# Altium PCB maximator-shield.PcbDoc
Units mil, origin at the board's own origin, x right, y up, seen from the top; angles counter-clockwise.
Board outline 2475 x 2175 mil, 2 copper layers (Top Layer, Bottom Layer); 56 components, 43 nets, 187 pads, 78 vias.
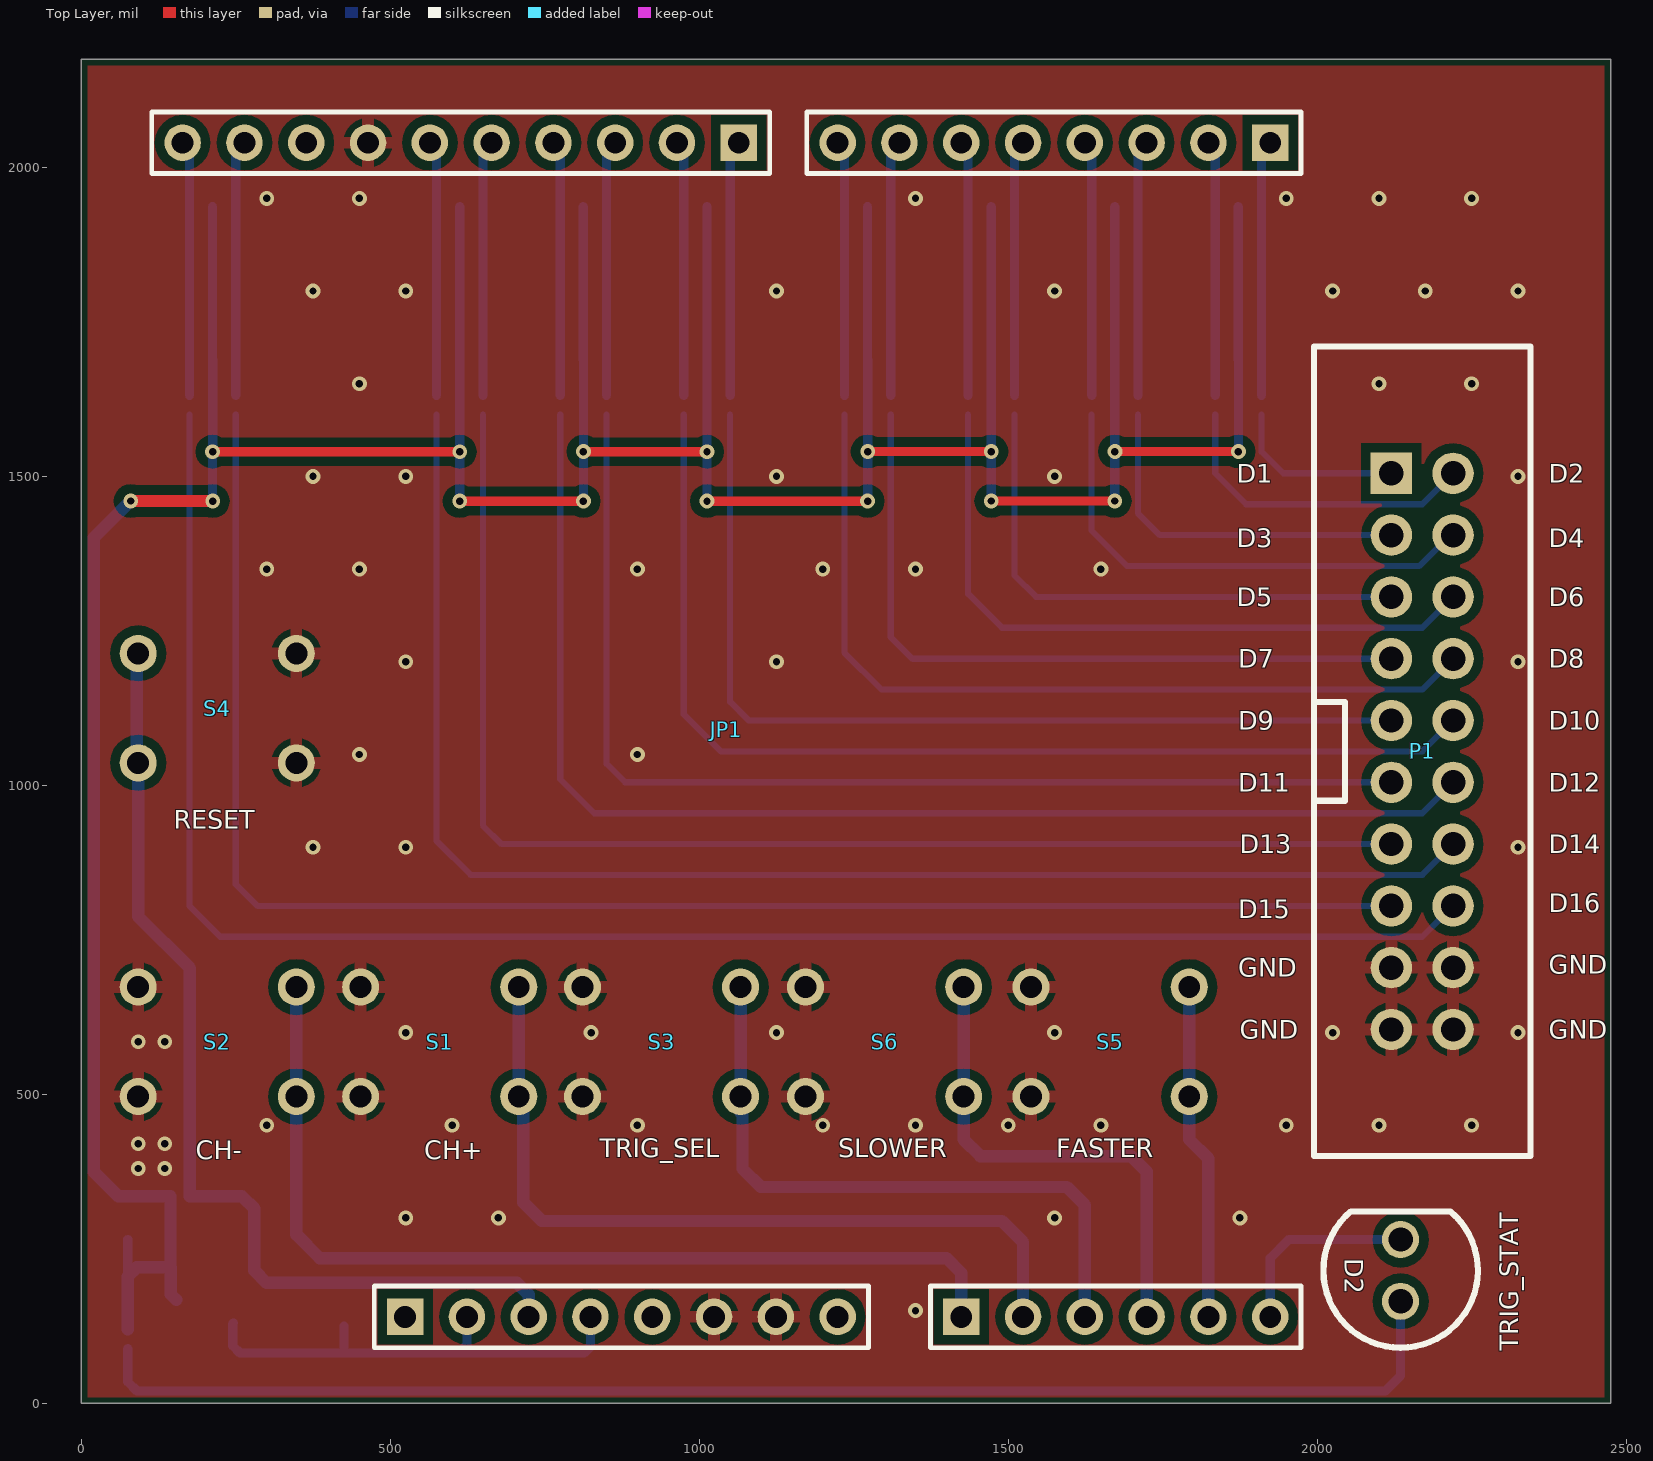
[diagram p0: Top Layer view]
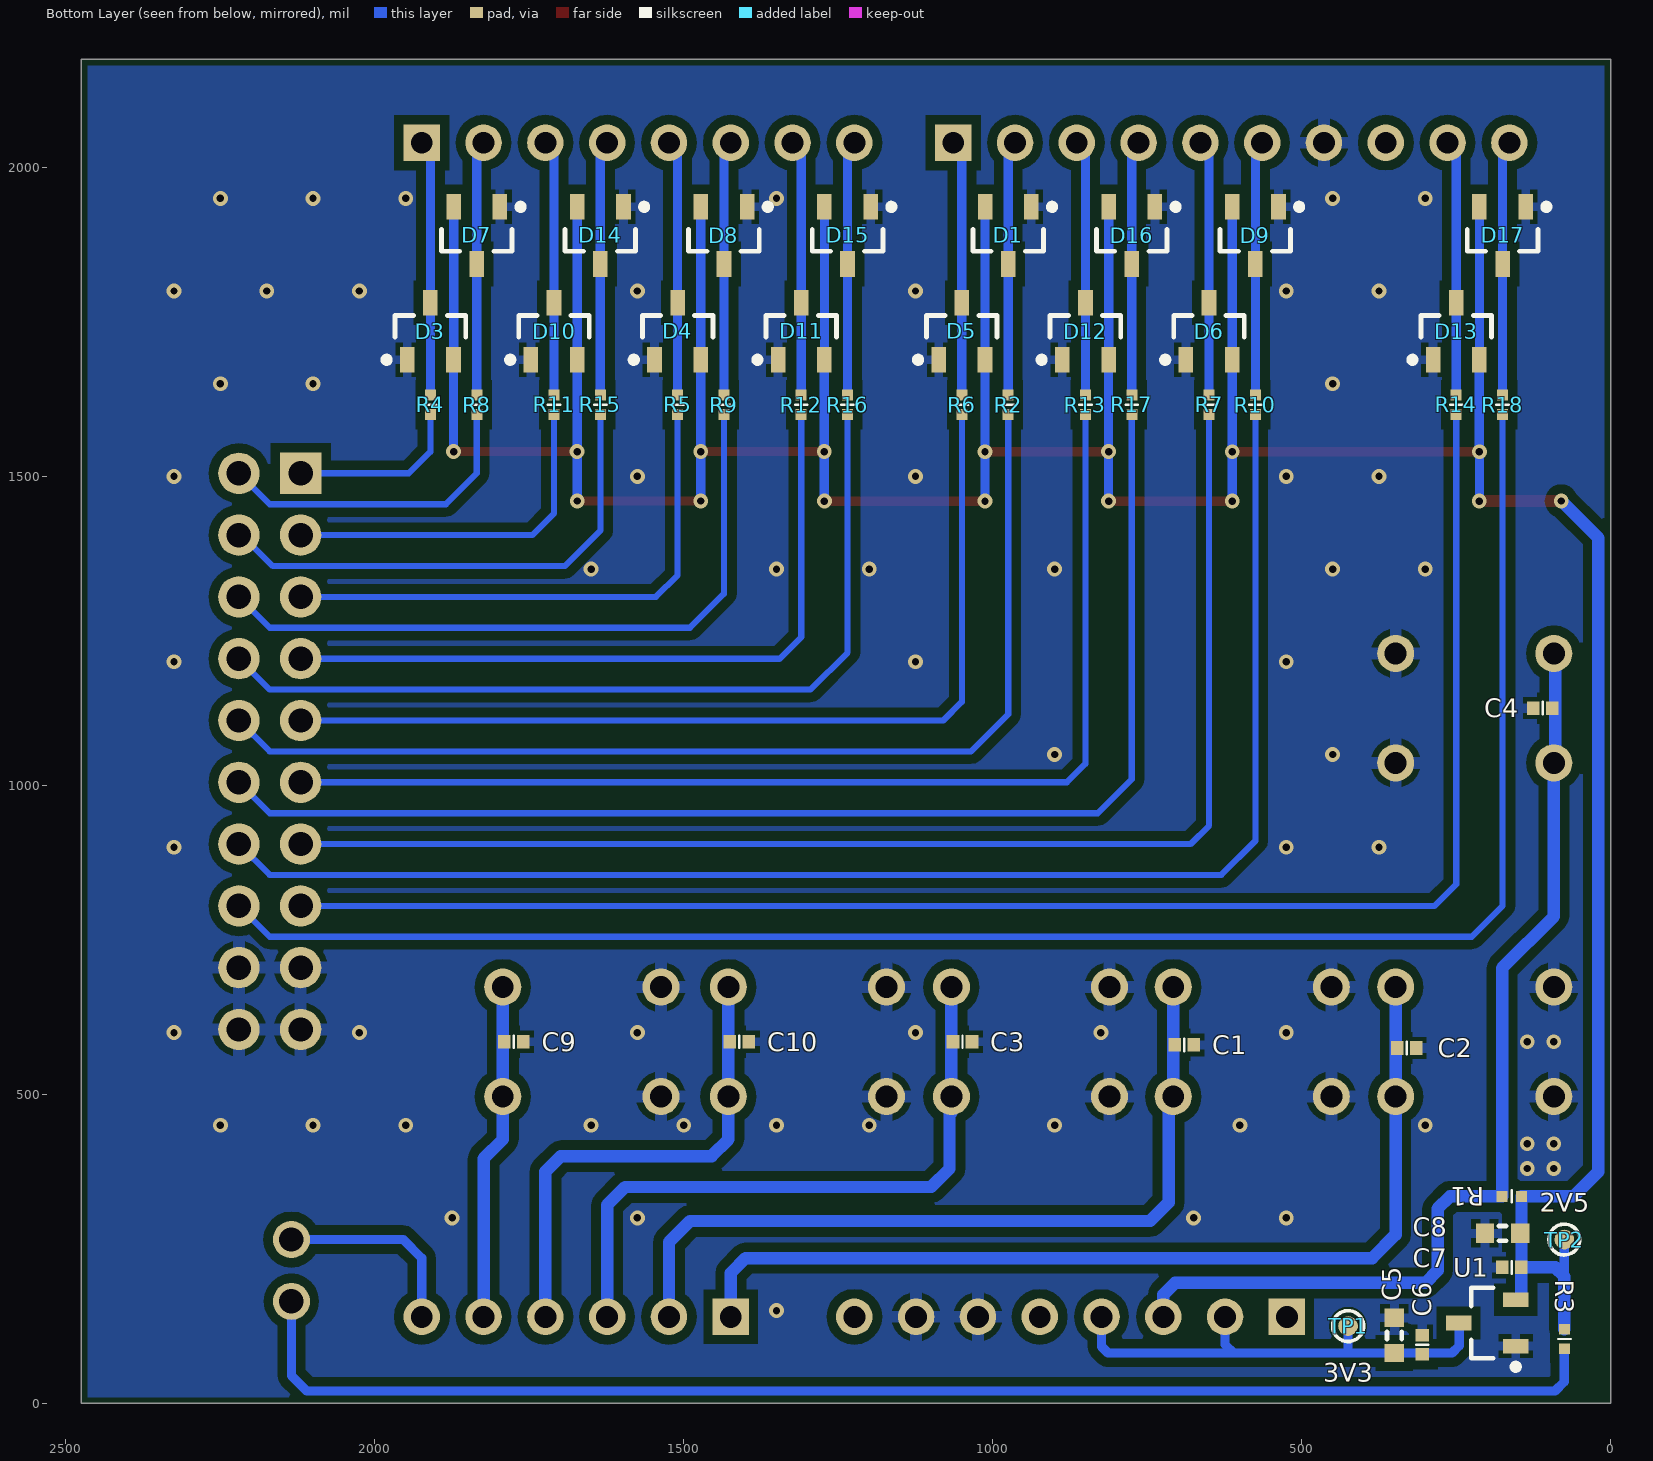
[diagram p1: Bottom Layer view, seen from below]

## Layer stack, top to bottom
Top Solder: solder mask 0.4, Solder Resist, Dk 3.5
Top Layer: signal copper 1.4
Dielectric 1: dielectric 12.6, FR-4, Dk 4.8
Bottom Layer: signal copper 1.4
Bottom Solder: solder mask 0.4, Solder Resist, Dk 3.5

## Board outline
0,0 2475,0 2475,2175 0,2175

## Design rules (kind name [scope] priority, off if disabled: settings)
BoardOutlineClearance [All] p1: gap=10 ignorepadtopadclearanceinfootprint=FALSE
Clearance [All] p1: gap=6 ignorepadtopadclearanceinfootprint=TRUE except(15: Arc-Poly Track-Poly SMDPad-Poly THPad-Poly Via-Poly Fill-Poly Poly-Poly)
DiffPairsRouting [All] p1: maxlimit=10 minlimit=6 mostfreqgap=7 toplayer_minwidth=6 toplayer_maxwidth=15 toplayer_prefwidth=6 bottomlayer_minwidth=6 bottomlayer_maxwidth=15 bottomlayer_prefwidth=6 maxuncoupledlength=500
HoleSize [All] p1: absolutevalues=TRUE maxlimit=248 minlimit=8 maxpercent=80.000 minpercent=20.000
MinimumSolderMaskSliver [All] p1: minsoldermaskwidth=1
PlaneConnect PlaneConnect_1 [All] p1: pad.planeconnectstyle=Relief pad.reliefexpansion=20 pad.reliefentries=4 pad.reliefconductorwidth=10 pad.reliefairgap=10 via.planeconnectstyle=Direct via.reliefexpansion=20 via.reliefentries=4 via.reliefconductorwidth=10 via.reliefairgap=10
PolygonConnect [All] p1: thpad.connectstyle=Relief thpad.reliefconductorwidth=20 thpad.reliefentries=4 thpad.polygonreliefangle="90 Angle" thpad.airgapwidth=10 smdpad.connectstyle=Relief smdpad.reliefconductorwidth=15 smdpad.reliefentries=4 smdpad.polygonreliefangle="90 Angle" smdpad.airgapwidth=7 via.connectstyle=Direct via.reliefconductorwidth=10 via.reliefentries=4 via.polygonreliefangle="90 Angle" via.airgapwidth=10
RoutingVias [All] p1: holewidth=12 width=24 viastyle="Through Hole" minholewidth=11.81 minwidth=24 maxholewidth=12 maxwidth=24
SilkToSolderMaskClearance SilkToSolderMaskClearance_TPad [HasFootprint('TP_PAD')] p1: minsilkscreentomaskgap=1 clearancetoexposedcopper=TRUE
SilkToSolderMaskClearance SilkToSolderMaskClearance_R0402 [HasFootprint('R_0402_1005')] p2: minsilkscreentomaskgap=3 clearancetoexposedcopper=TRUE
SilkToSolderMaskClearance SilkToSolderMaskClearance_C0603 [HasFootprint('C_0603_1608')] p3: minsilkscreentomaskgap=2 clearancetoexposedcopper=TRUE
SilkToSolderMaskClearance SilkToSolderMaskClearance_C0402 [HasFootprint('C_0402_1005')] p4: minsilkscreentomaskgap=3 clearancetoexposedcopper=TRUE
SilkToSolderMaskClearance [IsPad] p5: minsilkscreentomaskgap=5 clearancetoexposedcopper=TRUE
SolderMaskExpansion SolderMaskExpansion_Via [IsVia] p1: expansion=0 soldermaskfromhole=TRUE
SolderMaskExpansion [InPadClass('All Pads')] p2: expansion=3
Width [All] p1: maxlimit=100 minlimit=6 preferedwidth=15 minimp=50.000000 maximp=50.000000 favimp=50.000000
25 further rules are at their usual default settings.

## Classes and differential pairs
component class U_pin_conditiong: D1 D3 D4 D5 D6 D7 D8 D9 D10 D11 D12 D13 D14 D15 D16 D17 R2 R4 R5 R6 R7 R8 R9 R10 R11 R12 R13 R14 R15 R16 R17 R18
component class U_peripherals: C1 C2 C3 C4 C9 C10 D2 R1 R3 S1 S2 S3 S4 S5 S6
component class U_connectors: JP1 P1
component class top: C5 C6 C7 C8 TP1 TP2 U1

## Components (designator, comment, footprint, x,y, rotation, side; value= is the part's Value field where it differs from the comment)
C1 "Ceramic X7R" C_0402_1005 690,580 r180 bottom value=100nF
C2 "Ceramic X7R" C_0402_1005 330,575 r180 bottom value=100nF
C3 "Ceramic X7R" C_0402_1005 1049,585 r180 bottom value=100nF
C4 "Ceramic X7R" C_0402_1005 110,1125 r0 bottom value=100nF
C5 "Ceramic X7R" C_0603_1608 350,110 r90 bottom value=1uF
C6 "Ceramic X7R" C_0402_1005 305,95 r90 bottom value=100nF
C7 "Ceramic X7R" C_0402_1005 160,220 r0 bottom value=100nF
C8 "Ceramic X7R" C_0603_1608 175,275 r0 bottom value=1uF
C9 "Ceramic X7R" C_0402_1005 1775,585 r180 bottom value=100nF
C10 "Ceramic X7R" C_0402_1005 1410,585 r180 bottom value=100nF
D1 "BAS70-4" BAS70-4 975,1890 r270 bottom
D2 "TRIG_STAT" LED_5mm 2135,165 r90 top
D3 "BAS70-4" BAS70-4 1910,1735 r90 bottom
D4 "BAS70-4" BAS70-4 1510,1735 r90 bottom
D5 "BAS70-4" BAS70-4 1050,1735 r90 bottom
D6 "BAS70-4" BAS70-4 650,1735 r90 bottom
D7 "BAS70-4" BAS70-4 1835,1890 r270 bottom
D8 "BAS70-4" BAS70-4 1435,1890 r270 bottom
D9 "BAS70-4" BAS70-4 575,1890 r270 bottom
D10 "BAS70-4" BAS70-4 1710,1735 r90 bottom
D11 "BAS70-4" BAS70-4 1310,1735 r90 bottom
D12 "BAS70-4" BAS70-4 850,1735 r90 bottom
D13 "BAS70-4" BAS70-4 250,1735 r90 bottom
D14 "BAS70-4" BAS70-4 1635,1890 r270 bottom
D15 "BAS70-4" BAS70-4 1235,1890 r270 bottom
D16 "BAS70-4" BAS70-4 775,1890 r270 bottom
D17 "BAS70-4" BAS70-4 175,1890 r270 bottom
JP1 "Goldpin Male-Female straight" JP_ARDUINO_UNO_HEADER 524,140 r0 top locked value=PRT-11417
P1 "2x10 IDC 2.54" J-LINK_20_pin_2.54 2220,1505 r270 top
R1 "Resistor" R_0402_1005 160,335 r180 bottom value=100k
R2 "Resistor" R_0402_1005 975,1615.75 r90 bottom value=1k
R3 "Resistor" R_0402_1005 75,104.09 r270 bottom value=470R
R4 "Resistor" R_0402_1005 1910,1615.75 r90 bottom value=1k
R5 "Resistor" R_0402_1005 1510,1615.75 r90 bottom value=1k
R6 "Resistor" R_0402_1005 1050,1615.75 r90 bottom value=1k
R7 "Resistor" R_0402_1005 650,1615.75 r90 bottom value=1k
R8 "Resistor" R_0402_1005 1835,1615.75 r90 bottom value=1k
R9 "Resistor" R_0402_1005 1435,1615.75 r90 bottom value=1k
R10 "Resistor" R_0402_1005 575,1615.75 r90 bottom value=1k
R11 "Resistor" R_0402_1005 1710,1615.75 r90 bottom value=1k
R12 "Resistor" R_0402_1005 1310,1615.75 r90 bottom value=1k
R13 "Resistor" R_0402_1005 850,1615.75 r90 bottom value=1k
R14 "Resistor" R_0402_1005 250,1615.75 r90 bottom value=1k
R15 "Resistor" R_0402_1005 1635,1615.75 r90 bottom value=1k
R16 "Resistor" R_0402_1005 1235,1615.75 r90 bottom value=1k
R17 "Resistor" R_0402_1005 775,1615.75 r90 bottom value=1k
R18 "Resistor" R_0402_1005 175,1615.75 r90 bottom value=1k
S1 "CH+" TACT-613N-F 580,585 r90 top
S2 "CH-" TACT-613N-F 220,585 r90 top
S3 "TRIG_SEL" TACT-613N-F 939,585 r90 top
S4 "RESET" TACT-613N-F 220,1125 r270 top
S5 "FASTER" TACT-613N-F 1665,585 r90 top
S6 "SLOWER" TACT-613N-F 1300,585 r90 top
TP1 "3V3" TP_PAD 425,125 r90 bottom value="=\"Manufacturer Part Number\""
TP2 "2V5" TP_PAD 75,265 r180 bottom value="=\"Manufacturer Part Number\""
U1 "AP2138" AP2138 200,130 r0 bottom

## Footprints (in the part's own frame and the unit in brackets; to place one, negate y for a bottom-side part, rotate by r counter-clockwise, add the part's x,y. Pads: shape width x height; smd on the part's side, far side on the other; paste and mask are expansions set on the pad)
AP2138 [mm] "IC: stabilizator napięcia; LDO,liniowy,nieregulowany; 2,5V; SMD"
  rect 1.05x0.6 smd: 1(-1.175,0.95) 2(-1.175,-0.95) 3(1.175,0)
  silkscreen extent -1.3,-1.45 0.65,1.92, body extent -1.3,-1.46 1.3,1.46, height 1.2
BAS70-4 [mm] "Dioda: prostownicza Schottky; SMD; 70V; 70mA; 5ns; SOT23; 200mW"
  rect 1.05x0.6 smd: 1(-1.175,0.95) 2(-1.175,-0.95) 3(1.175,0)
  silkscreen extent -1.3,-1.45 0.65,1.92, body extent -1.3,-1.46 1.3,1.46, height 1.2
C_0402_1005 [mm]
  rect 0.52x0.56 smd: 1(-0.39,0) 2(0.39,0)
  silkscreen extent 0,-0.25 0,0.25, body extent -0.52,-0.27 0.53,0.28, height 0.55
C_0603_1608 [mm]
  rect 0.75x0.8 smd: 1(-0.725,0) 2(0.725,0)
  silkscreen extent -0.15,-0.3 0.15,0.3, body extent -0.85,-0.45 0.85,0.45, height 0.89
J-LINK_20_pin_2.54 [mm] "J-LINK_20_pin_2.54 header"
  rect 1.7x1.7 hole 1: 1(0,-2.54)
  round 1.7 hole 1: 2(0,0) 3(2.54,-2.54) 4(2.54,0) 5(5.08,-2.54) 6(5.08,0) 7(7.62,-2.54) 8(7.62,0) 9(10.16,-2.54) 10(10.16,0) 11(12.7,-2.54) 12(12.7,0) 13(15.24,-2.54) 14(15.24,0) 15(17.78,-2.54) 16(17.78,0) 17(20.32,-2.54) 18(20.32,0) 19(22.86,-2.54) 20(22.86,0)
  silkscreen extent -5.21,-5.72 28.07,3.18, body extent -5.17,-5.72 28.03,3.18, height 9.2
JP_ARDUINO_UNO_HEADER [mm] "Connector; Header; 6 8 8 10Position; Male-Female"
  rect 1.5x1.5 hole 0.9: 1(0,0) 9(22.86,0) 15(35.56,48.26) 23(13.716,48.26)
  round 1.5 hole 0.9: 2(2.54,0) 3(5.08,0) 4(7.62,0) 5(10.16,0) 6(12.7,0) 7(15.24,0) 8(17.78,0) 10(25.4,0) 11(27.94,0) 12(30.48,0) 13(33.02,0) 14(35.56,0) 16(33.02,48.26) 17(30.48,48.26) 18(27.94,48.26) 19(25.4,48.26) 20(22.86,48.26) 21(20.32,48.26) 22(17.78,48.26) 24(11.176,48.26) 25(8.636,48.26) 26(6.096,48.26) 27(3.556,48.26) 28(1.016,48.26) 29(-1.524,48.26) 30(-4.064,48.26) 31(-6.604,48.26) 32(-9.144,48.26)
  silkscreen extent -10.41,-1.27 36.83,49.53, body extent -10.41,-1.27 36.83,49.53, height 8.5
LED_5mm [mil] "LED 5mm diameter"
  round 60 hole 39.37: 1(0,0) 2(100,0)
  silkscreen extent -75,-125 146,125, body extent -73,-113 143,123, height 350
R_0402_1005 [mm]
  rect 0.45x0.45 smd: 1(-0.4,0) 2(0.4,0)
  silkscreen extent 0,-0.25 0,0.25, body extent -0.52,-0.3 0.52,0.3, height 0.34
TACT-613N-F [mm] "Mikroprze彻cznik TACT; SPST-NO; Pozycje: 2; 0,05A/12VDC"
  round 1.524 hole 0.9: 1(-2.25,3.25) 2(2.25,3.25) 3(-2.25,-3.25) 4(2.25,-3.25)
  body extent -3,-3.85 3,3.85, height 7
TP_PAD [mil] "Small SMD testpoint"
  round 32 smd paste-16: 1(0,0)
  silkscreen extent -25,-25 25,25

## Part data
C1 C2 C3 C4 C9 C10: library part C_100nF_16V_X7R_0402_10, "Capacitor", Dielectric=X7R, Manufacturer=Murata, Manufacturer Part Number=GRM155R71C104KA88D, Tolerance (%)=10, Voltage=16V, HelpURL=https://www.mouser.com/ds/2/281/c02e-2905.pdf, Part Number=C_100nF_16V_X7R_0402_10, SCH_Footprint=0402, Supplier 1=TME, Supplier 2="RS Components", Supplier 3=Farnell, Supplier 4=Mouser, Supplier 5=Digi-Key, Supplier Part Number 4=81-GRM155R71C104KA88
C5 C8: library part C_1uF_25V_X7R_0603_10, "Capacitor", Dielectric=X7R, Manufacturer=Samsung, Manufacturer Part Number=CL10B105KA8NNNC, Tolerance (%)=10, Voltage=25V, HelpURL=http://www.tme.eu/pl/Document/4a42202b32dab16128fe107dd69598cc/samsung-chip-cap.pdf, Part Number=C_1uF_25V_X7R_0603_10, SCH_Footprint=0603, Supplier 1=TME, Supplier 2="RS Components", Supplier 3=Farnell, Supplier 4=Mouser, Supplier 5=Digi-Key, Supplier Part Number 1=CL10B105KA8NNNC
C6 C7: library part C_100nF_50V_X7R_0402_10, "Capacitor", Dielectric=X7R, Manufacturer=Murata, Manufacturer Part Number=GRM155R71H104KE14D, Tolerance (%)=10, Voltage=50V, HelpURL=http://docs-europe.electrocomponents.com/webdocs/145f/0900766b8145f9d2.pdf, Part Number=C_100nF_50V_X7R_0402_10, SCH_Footprint=0402, Supplier 1=TME, Supplier 2="RS Components", Supplier 3=Farnell, Supplier 4=Mouser, Supplier 5=Digi-Key, Supplier Part Number 1=GRM155R71H104KE14D, Supplier Part Number 2=8847087, Supplier Part Number 3=2611912, Supplier Part Number 4=81-GRM155R71H104KE4D, Supplier Part Number 5=490-10700-1-ND
D1 D3 D4 D5 D6 D7 D8 D9 D10 D11 D12 D13 D14 D15 D16 D17: "Dioda: prostownicza Schottky; SMD; 70V; 70mA; 5ns; SOT23; 200mW"
D2: library part LED_5mm, "LED_5mm Diameter"
JP1: library part JP_ARDUINO_UNO_HEADER_1x6_1x8_1x8_1x10_2.54, "Header 6-Pin, 8-Pin, 8-Pin, 10-Pin", Manufacturer=Sparkfun, Manufacturer Part Number=PRT-11417, Component Type=Standard, HelpURL=https://media.digikey.com/pdf/Data%20Sheets/Sparkfun%20PDFs/PRT-11417_Web.pdf, Part Number=JP_ARDUINO_UNO_HEADER_1x6_1x8_1x8_1x10_2.54, SCH_Footprint="1x6 1x8 1x8 1x10 2.54mm Vertical", Supplier 1=TME, Supplier 2="RS Components", Supplier 3=Farnell, Supplier 4=Mouser, Supplier 5=Digi-Key, Supplier Part Number 4=474-PRT-11417, Supplier Part Number 5=1568-1413-ND
P1: library part Header_2x10_2.54_Shrouded
R1: library part R_100k_0402_1, Manufacturer=Yageo, Manufacturer Part Number=RC0402FR-07100KL, Power=63mW, Supplier Part Number 1=RC0402FR-07100K, Tolerance=1%, Voltage=50V, HelpURL=http://www.tme.eu/pl/Document/1a2bc76e2be68b3b1670068306778ce6/rc0402yageo.pdf, Part Number=R_100k_0402_1, SCH_Footprint=0402, Supplier 1=TME, Supplier 2="RS Components", Supplier 3=Farnell, Supplier 4=Mouser, Supplier 5=Digi-Key, Supplier Part Number 3=2131798, Supplier Part Number 4=603-RC0402FR-07100KL, Supplier Part Number 5=311-100KLRCT-ND
R2 R4 R5 R6 R7 R8 R9 R10 R11 R12 R13 R14 R15 R16 R17 R18: library part R_1k_0402_1, Manufacturer=Yageo, Manufacturer Part Number=RC0402FR-071K, Power=63mW, Tolerance=1%, Voltage=50V, HelpURL=http://www.tme.eu/pl/Document/1a2bc76e2be68b3b1670068306778ce6/rc0402yageo.pdf, Part Number=R_1k_0402_1, SCH_Footprint=0402, Supplier 1=TME, Supplier 2="RS Components", Supplier 3=Farnell, Supplier 4=Mouser, Supplier 5=Digi-Key, Supplier Part Number 1=RC0402FR-071K, Supplier Part Number 3=9239235, Supplier Part Number 4=603-RC0402FR-071KP, Supplier Part Number 5=311-1.00KLRCT-ND
R3: library part R_470R_0402_1, Manufacturer=Yageo, Manufacturer Part Number=RC0402FR-07470RL, Power=63mW, Supplier Part Number 1=RC0402FR-07470R, Tolerance=1%, Voltage=50V, HelpURL=http://datasheet.octopart.com/RC0402FR-07470RL-Yageo-datasheet-10408619.pdf, Part Number=R_470R_0402_1, SCH_Footprint=0402, Supplier 1=TME, Supplier 2="RS Components", Supplier 3=Farnell, Supplier 4=Mouser, Supplier 5=Digi-Key, Supplier Part Number 3=9239197, Supplier Part Number 4=603-RC0402FR-07470RL, Supplier Part Number 5=311-470LRCT-ND
S1 S2 S3 S4 S5 S6: library part TACT-613N-F
TP1 TP2: library part TP_PAD, "Testpoint", Component Type="Standard (No BOM)", Part Number=TP_PAD, SCH_Footprint=SMD, Supplier 1=TME, Supplier 2="RS Components", Supplier 3=Farnell, Supplier 4=Mouser, Supplier 5=Digi-Key
U1: "IC: stabilizator napi?cia; LDO,liniowy,nieregulowany; 2,5V; SMD"

## Via types
v1: diameter 24, hole 12, Top Layer to Bottom Layer, 78 vias

## Nets (pads, with @x,y where several pads share a name; then routed paths per layer and width w, separated by ;. In a path a pad name is that pad's centre, name@x,y a point inside that pad or via, vN(x,y) a via of type N, cw(c..) or ccw(c..) an arc to the next point about the centre after c; other vN are vias at no path point)
2V5: C7.1 C8.1 D1.2 D3.2 D4.2 D5.2 D6.2 D7.2 D8.2 D9.2 D10.2 D11.2 D12.2 D13.2 D14.2 D15.2 D16.2 D17.2 R1.2 R3.1 TP2.1 U1.2 | length 7167
  Top Layer w15: v1@212.2,1540.2 v1(212.4,1540) v1(612.4,1540) ; v1(612.4,1460) v1(812.6,1460) ; v1(812.6,1540.2) 812.8,1540 v1(1012.6,1540) ; v1(1012.6,1460) v1(1272.4,1460) ; v1(1272.6,1540.2) v1(1472.6,1540.2) ; v1(1472.6,1460.2) v1(1672.4,1460.2) ; v1(1672.6,1540.2) v1(1872.6,1540.2) v1@1872.4,1540
  Top Layer w20: v1(80,1460.2) 212.4,1460.2 v1(212.6,1460)
  Bottom Layer w15: 75,205 TP2.1 ; D17.2 212.4,1688.94 D13.2 212.6,1540.2 v1(212.4,1540) 212.4,1460.2 v1(212.6,1460) ; v1(612.4,1460) v1(612.4,1540) D9.2 ; D16.2 812.4,1688.94 D12.2 v1(812.6,1540.2) v1(812.6,1460) ; D1.2 1012.4,1688.94 D5.2 v1(1012.6,1540) v1(1012.6,1460) ; v1(1272.4,1460) 1272.6,1460.2 v1(1272.6,1540.2) D11.2 1272.4,1688.94 D15.2 ; D8.2 1472.4,1688.94 D4.2 v1(1472.6,1540.2) v1(1472.6,1460.2) ; v1(1672.4,1460.2) 1672.6,1460.39 v1(1672.6,1540.2) D10.2 1672.4,1688.94 D14.2 ; D7.2 1872.4,1688.94 D3.2 v1(1872.6,1540.2)
  Bottom Layer w20: R3.1 75,205 90,220 C7.1 ; v1(80,1460.2) 79.8,1460.2 20,1400.39 20,375 60,335 R1.2 144.25,220.39 C7.1 ; U1.2 144.65,176.5 C7.1
3V3: C5.1 C6.1 JP1.2 JP1.4 TP1.1 U1.3 | length 781.2
  Bottom Layer w15: U1.3 245,128.74 245,93.35 256.89,81.46 C5.1 425,81.46 ; TP1.1 425,81.46 ; JP1.2 624,95 610.46,81.46 ; JP1.4 824,91.91 813.54,81.46 610.46,81.46 ; 425,81.46 610.46,81.46
CH_+: C1.1 JP1.10 S1.3 S1.4 | length 1300.8
  Bottom Layer w20: S1.3@705.35,493.82 S1.3 S1.4@707.95,668.58 ; S1.3@715.35,493.82 715.35,325 745.35,295 1490,295 1524,261 JP1.10
CH_-: C2.1 JP1.9 S2.3 S2.4 | length 1563.3
  Bottom Layer w20: S2.4@347.95,663.58 S2.3 347.95,272.95 385.91,235 1400,235 1424,211 JP1.9
D1: P1.1 R4.1 | length 284.5
  Bottom Layer w10: R4.1 1910,1540 1945,1505 P1.1
D2: P1.2 R8.1 | length 521.4
  Bottom Layer w10: R8.1 1835,1505 1885,1455 2170,1455 P1.2
D3: P1.3 R11.1 | length 584.5
  Bottom Layer w10: R11.1 1710,1440 1745,1405 P1.3
D4: P1.4 R15.1 | length 817.1
  Bottom Layer w10: R15.1 1635,1412.4 1692.4,1355 2165,1355 2215,1405 P1.4
D5: P1.5 R5.1 | length 884.5
  Bottom Layer w10: R5.1 1510,1340 1545,1305 P1.5
D6: P1.6 R9.1 | length 1118.5
  Bottom Layer w10: R9.1 1435,1310 1490,1255 2170,1255 P1.6
D7: P1.7 R12.1 | length 1184.5
  Bottom Layer w10: R12.1 1310,1240 1345,1205 P1.7
D8: P1.8 R16.1 | length 1415.6
  Bottom Layer w10: R16.1 1235,1215 1295,1155 2170,1155 P1.8
D9: P1.9 R6.1 | length 1547.4
  Bottom Layer w10: R6.1 1050,1135 1080,1105 P1.9
D10: P1.10 R2.1 | length 1775.6
  Bottom Layer w10: R2.1 975,1115 1035,1055 2170,1055 P1.10
D11: P1.11 R13.1 | length 1847.4
  Bottom Layer w10: R13.1 850,1035 880,1005 P1.11
D12: P1.12 R17.1 | length 2078.5
  Bottom Layer w10: R17.1 775,1010 830,955 2170,955 P1.12
D13: P1.13 R7.1 | length 2147.4
  Bottom Layer w10: R7.1 650,935 680,905 P1.13
D14: P1.14 R10.1 | length 2378.5
  Bottom Layer w10: R10.1 575,910 630,855 2170,855 P1.14
D15: P1.15 R14.1 | length 2644.5
  Bottom Layer w10: R14.1 250,840 285,805 P1.15
D16: P1.16 R18.1 | length 2881.4
  Bottom Layer w10: R18.1 175,805 225,755 2170,755 P1.16
D_OUT1: D3.3 JP1.15 R4.2 | length 414.3
  Bottom Layer w15: R4.2 D3.3 1910,2026 JP1.15
D_OUT2: D7.3 JP1.16 R8.2 | length 413.1
  Bottom Layer w15: JP1.16 1835,2029 D7.3 R8.2
D_OUT3: D10.3 JP1.17 R11.2 | length 414.3
  Bottom Layer w15: R11.2 D10.3 1710,2026 JP1.17
D_OUT4: D14.3 JP1.18 R15.2 | length 413.1
  Bottom Layer w15: JP1.18 1635,2029 D14.3 R15.2
D_OUT5: D4.3 JP1.19 R5.2 | length 414.3
  Bottom Layer w15: R5.2 D4.3 1510,2026 JP1.19
D_OUT6: D8.3 JP1.20 R9.2 | length 413.1
  Bottom Layer w15: JP1.20 1435,2029 D8.3 R9.2
D_OUT7: D11.3 JP1.21 R12.2 | length 414.3
  Bottom Layer w15: R12.2 D11.3 1310,2026 JP1.21
D_OUT8: D15.3 JP1.22 R16.2 | length 413.1
  Bottom Layer w15: JP1.22 1235,2029 D15.3 R16.2
D_OUT9: D5.3 JP1.23 R6.2 | length 414.3
  Bottom Layer w15: R6.2 D5.3 1050,2026 JP1.23
D_OUT10: D1.3 JP1.24 R2.2 | length 413.1
  Bottom Layer w15: JP1.24 975,2029 D1.3 R2.2
D_OUT11: D12.3 JP1.25 R13.2 | length 414.3
  Bottom Layer w15: R13.2 D12.3 850,2026 JP1.25
D_OUT12: D16.3 JP1.26 R17.2 | length 413.1
  Bottom Layer w15: JP1.26 775,2029 D16.3 R17.2
D_OUT13: D6.3 JP1.27 R7.2 | length 414.3
  Bottom Layer w15: R7.2 D6.3 650,2026 JP1.27
D_OUT14: D9.3 JP1.28 R10.2 | length 413.1
  Bottom Layer w15: JP1.28 575,2029 D9.3 R10.2
D_OUT15: D13.3 JP1.31 R14.2 | length 414.3
  Bottom Layer w15: R14.2 D13.3 250,2026 JP1.31
D_OUT16: D17.3 JP1.32 R18.2 | length 413.1
  Bottom Layer w15: JP1.32 175,2029 D17.3 R18.2
FASTER: C9.1 JP1.13 S5.3 S5.4 | length 546.4
  Bottom Layer w20: S5.4 S5.3 1792.95,427.05 1824,396 JP1.13
GND: C1.2 C2.2 C3.2 C4.2 C5.2 C6.2 C7.2 C8.2 C9.2 C10.2 D1.1 D3.1 D4.1 D5.1 D6.1 D7.1 D8.1 D9.1 D10.1 D11.1 D12.1 D13.1 D14.1 D15.1 D16.1 D17.1 JP1.6 JP1.7 JP1.29 P1.17 P1.18 P1.19 P1.20 S1.1 S1.2 S2.1 S2.2 S3.1 S3.2 S4.1 S4.2 S5.1 S5.2 S6.1 S6.2 U1.1
  other v1: 1350,150 525,300 675,300 1575,300 1875,300 92.05,380 135,380 92.05,420 135,420 300,450 600,450 900,450 1200,450 1350,450 1500,450 1650,450 1950,450 2100,450 2250,450 92.05,585 135,585 525,600 825,600 1125,600 1575,600 2025,600 2325,600 375,900 525,900 2325,900 450,1050 900,1050 525,1200 1125,1200 2325,1200 300,1350 450,1350 900,1350 1200,1350 1350,1350 1650,1350 375,1500 525,1500 1125,1500 1575,1500 2325,1500 450,1650 2100,1650 2250,1650 375,1800 525,1800 1125,1800 1575,1800 2025,1800 2175,1800 2325,1800 300,1950 450,1950 1350,1950 1950,1950 2100,1950 2250,1950
N_RESET: C4.1 JP1.3 R1.1 S4.3 S4.4 | length 1621.9
  Bottom Layer w20: S4.4@90,1036.42 S4.3@90,1213.58 ; S4.4 92.05,787.95 175.75,704.25 R1.1 260,335 280,315 280,215 300,195 705,195 724,176 JP1.3
NetD2_1: D2.1 R3.2 | length 2249.9
  Bottom Layer w15: R3.2 75,59.13 75,35 90,20 2110,20 2135,45 D2.1
SLOWER: C10.1 JP1.12 S6.3 S6.4 | length 799.1
  Bottom Layer w20: S6.4 S6.3 1427.95,427.05 1455,400 1699,400 1724,375 JP1.12
TRIG_SEL: C3.1 JP1.11 S3.3 S3.4 | length 1060.6
  Bottom Layer w20: S3.4 S3.3 1066.95,470.42 1070,473.46 1070,379.65 1099.65,350 1595,350 1624,321 JP1.11
TRIG_STAT: D2.2 JP1.14 | length 318.4
  Bottom Layer w15: JP1.14 1924,235 1954,265 D2.2
pads on no net: JP1.1 JP1.5 JP1.8 JP1.30

## Polygon pours and split planes (outlines as drawn)
GND on Top Layer (solid, remove dead copper, pour order 2): 0,0 0,2175 2475,2175 2475,0
GND on Bottom Layer "Bottom Layer-No Net" (solid, remove dead copper, pour order 0): 0,2175 0,0 2475,0 2475,2175

## Silkscreen, mask and mechanical layers (free items; w line width, h text height)
Top Overlay:
  text "D1" at 1870,1490 h30
  text "D2" at 2375,1490 h30
  text "D3" at 1870,1385 h30
  text "D4" at 2375,1385 h30
  text "D5" at 1870,1290 h30
  text "D6" at 2375,1290 h30
  text "D7" at 1872.6,1190 h30
  text "D8" at 2375,1190 h30
  text "D9" at 1872.6,1090 h30
  text "D10" at 2375,1090 h30
  text "D11" at 1872.6,990 h30
  text "D12" at 2375,990 h30
  text "D13" at 1875,890 h30
  text "D14" at 2375,890 h30
  text "D16" at 2375,795 h30
  text "D15" at 1872.6,785 h30
  text "GND" at 2375,695 h30
  text "GND" at 1872.6,690 h30
  text "GND" at 1875,590 h30
  text "GND" at 2375,590 h30
Mechanical 1:
  the board outline again, w5

## Text inside footprints (layer, text, board x,y; h text height)
C1: Mechanical 17 "d" at 719,578 h5.12; Mechanical 19 "-" at 719,578 h5.12
C2: Mechanical 17 "d" at 359,573 h5.12; Mechanical 19 "-" at 359,573 h5.12
C3: Mechanical 17 "d" at 1078,583 h5.12; Mechanical 19 "-" at 1078,583 h5.12
C4: Mechanical 17 "d" at 81,1127 h5.12 r180; Mechanical 19 "-" at 81,1127 h5.12 r180
C5: Mechanical 17 "d" at 345,75 h10 r270; Mechanical 19 "-" at 345,75 h10 r270
C6: Mechanical 17 "d" at 303,66 h5.12 r270; Mechanical 19 "-" at 303,66 h5.12 r270
C7: Mechanical 17 "d" at 131,222 h5.12 r180; Mechanical 19 "-" at 131,222 h5.12 r180
C8: Mechanical 17 "d" at 140,280 h10 r180; Mechanical 19 "-" at 140,280 h10 r180
C9: Mechanical 17 "d" at 1804,583 h5.12; Mechanical 19 "-" at 1804,583 h5.12
C10: Mechanical 17 "d" at 1439,583 h5.12; Mechanical 19 "-" at 1439,583 h5.12
JP1: Mechanical 17 "d" at 544,110 h60; Mechanical 19 "-" at 544,110 h60
R1: Mechanical 17 "d" at 191.13,332.08 h5.12; Mechanical 19 "-" at 191,332 h5.12
R2: Mechanical 17 "d" at 972.08,1584.62 h5.12 r270; Mechanical 19 "-" at 972,1584.75 h5.12 r270
R3: Mechanical 17 "d" at 77.92,135.22 h5.12 r90; Mechanical 19 "-" at 78,135.09 h5.12 r90
R4: Mechanical 17 "d" at 1907.08,1584.62 h5.12 r270; Mechanical 19 "-" at 1907,1584.75 h5.12 r270
R5: Mechanical 17 "d" at 1507.08,1584.62 h5.12 r270; Mechanical 19 "-" at 1507,1584.75 h5.12 r270
R6: Mechanical 17 "d" at 1047.08,1584.62 h5.12 r270; Mechanical 19 "-" at 1047,1584.75 h5.12 r270
R7: Mechanical 17 "d" at 647.08,1584.62 h5.12 r270; Mechanical 19 "-" at 647,1584.75 h5.12 r270
R8: Mechanical 17 "d" at 1832.08,1584.62 h5.12 r270; Mechanical 19 "-" at 1832,1584.75 h5.12 r270
R9: Mechanical 17 "d" at 1432.08,1584.62 h5.12 r270; Mechanical 19 "-" at 1432,1584.75 h5.12 r270
R10: Mechanical 17 "d" at 572.08,1584.62 h5.12 r270; Mechanical 19 "-" at 572,1584.75 h5.12 r270
R11: Mechanical 17 "d" at 1707.08,1584.62 h5.12 r270; Mechanical 19 "-" at 1707,1584.75 h5.12 r270
R12: Mechanical 17 "d" at 1307.08,1584.62 h5.12 r270; Mechanical 19 "-" at 1307,1584.75 h5.12 r270
R13: Mechanical 17 "d" at 847.08,1584.62 h5.12 r270; Mechanical 19 "-" at 847,1584.75 h5.12 r270
R14: Mechanical 17 "d" at 247.08,1584.62 h5.12 r270; Mechanical 19 "-" at 247,1584.75 h5.12 r270
R15: Mechanical 17 "d" at 1632.08,1584.62 h5.12 r270; Mechanical 19 "-" at 1632,1584.75 h5.12 r270
R16: Mechanical 17 "d" at 1232.08,1584.62 h5.12 r270; Mechanical 19 "-" at 1232,1584.75 h5.12 r270
R17: Mechanical 17 "d" at 772.08,1584.62 h5.12 r270; Mechanical 19 "-" at 772,1584.75 h5.12 r270
R18: Mechanical 17 "d" at 172.08,1584.62 h5.12 r270; Mechanical 19 "-" at 172,1584.75 h5.12 r270
TP1: Mechanical 17 "d" at 413.19,114.17 h25 r270; Mechanical 19 "-" at 412.2,116.14 h25 r270
TP2: Mechanical 17 "d" at 85.83,253.19 h25; Mechanical 19 "-" at 83.86,252.2 h25